# Altium PCB Blue Pill Clock.PcbDoc
Units mil, origin at the board's own origin, x right, y up, seen from the top; angles counter-clockwise.
Board outline 3858.27 x 3858.27 mil, 2 copper layers (Top Layer, Bottom Layer); 37 components, 58 nets, 279 pads, 83 vias.
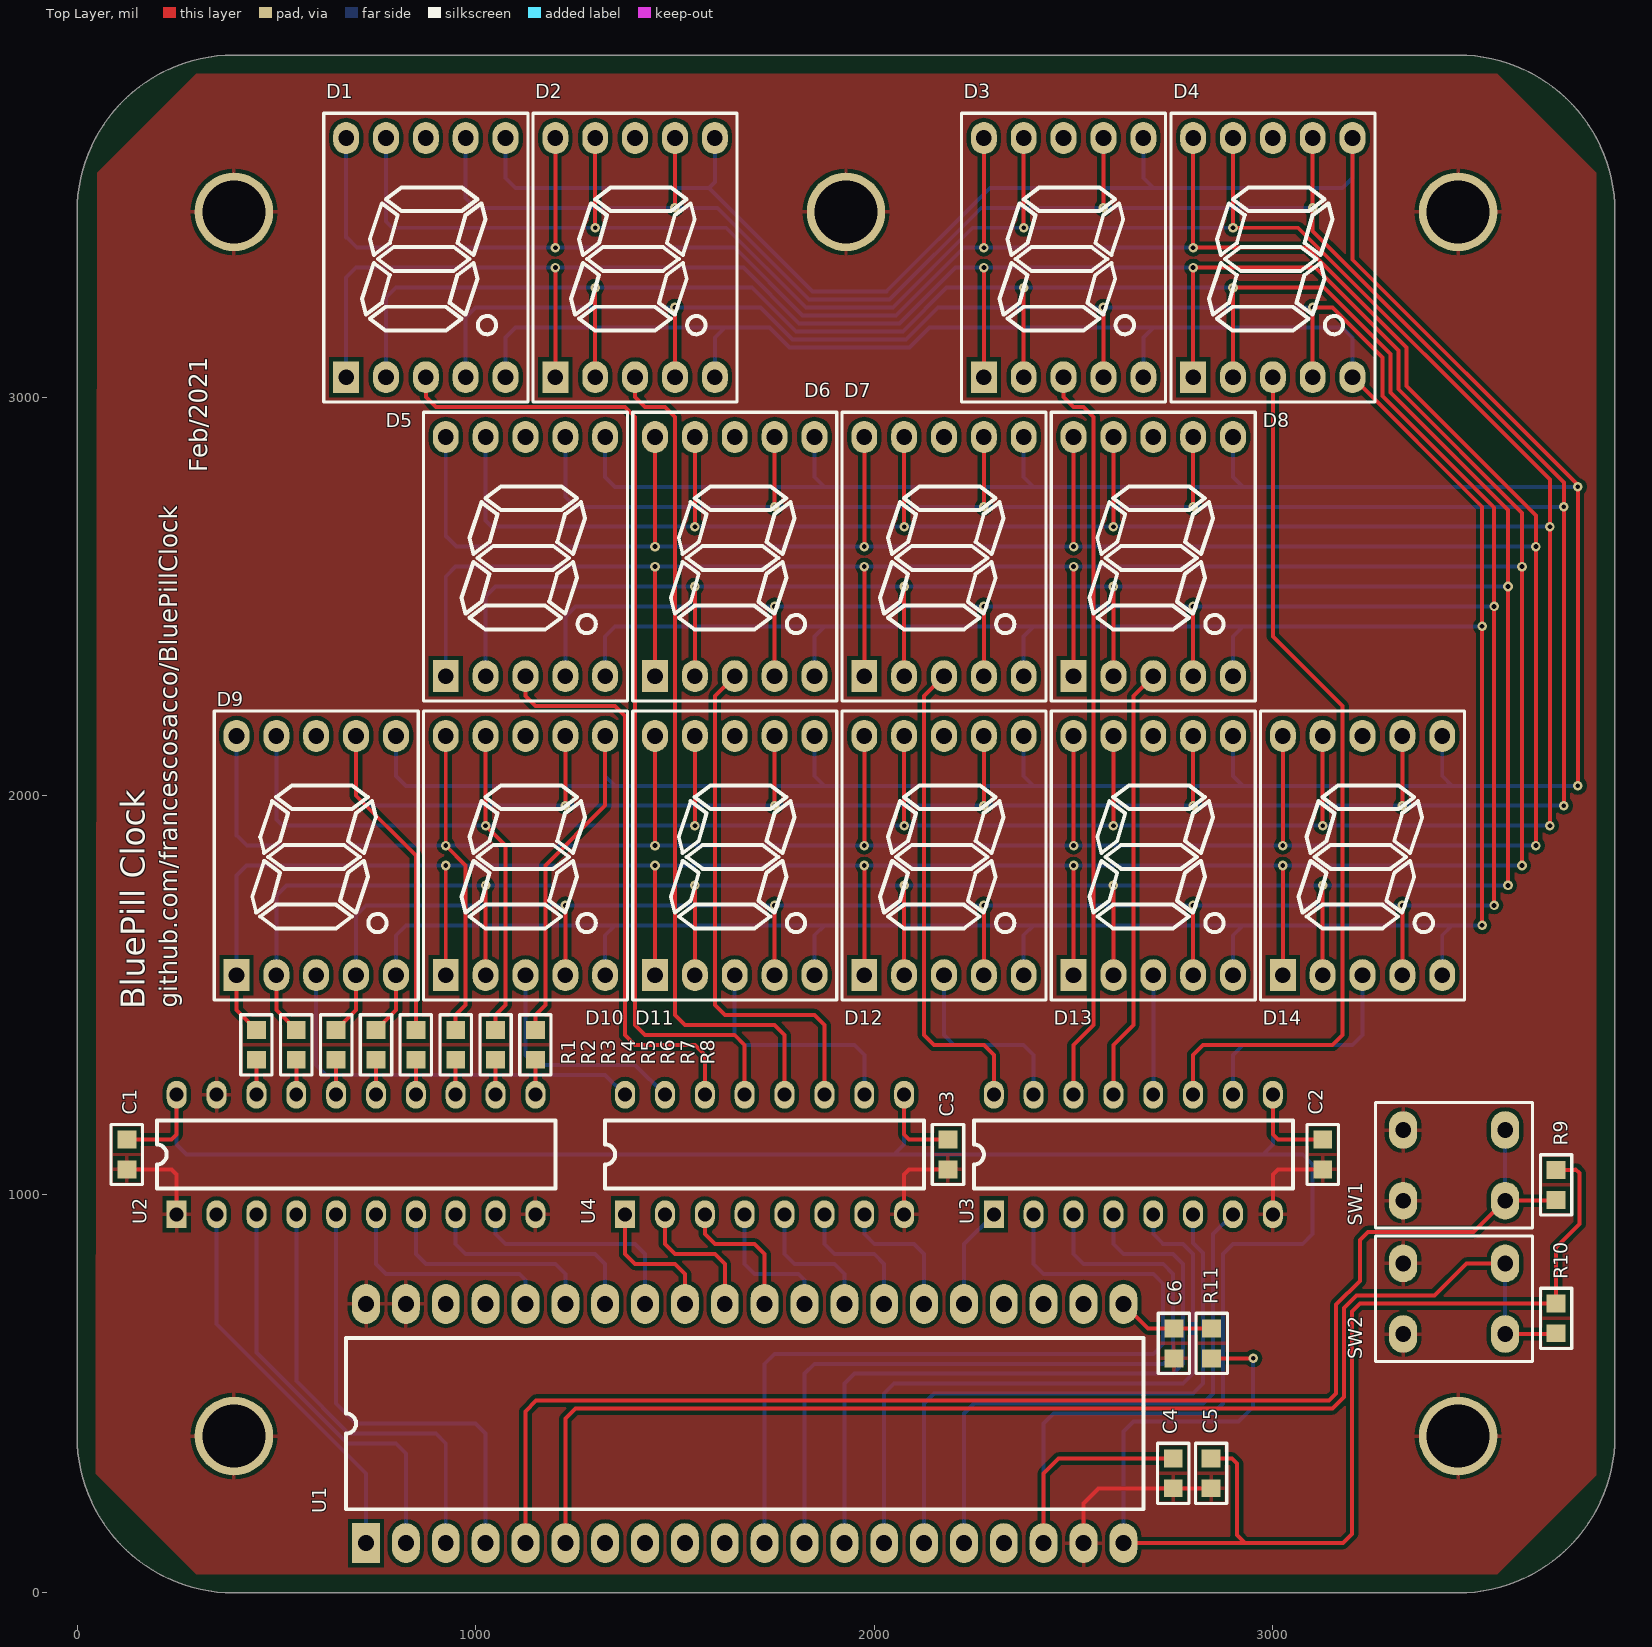
[diagram p0: Top Layer view]
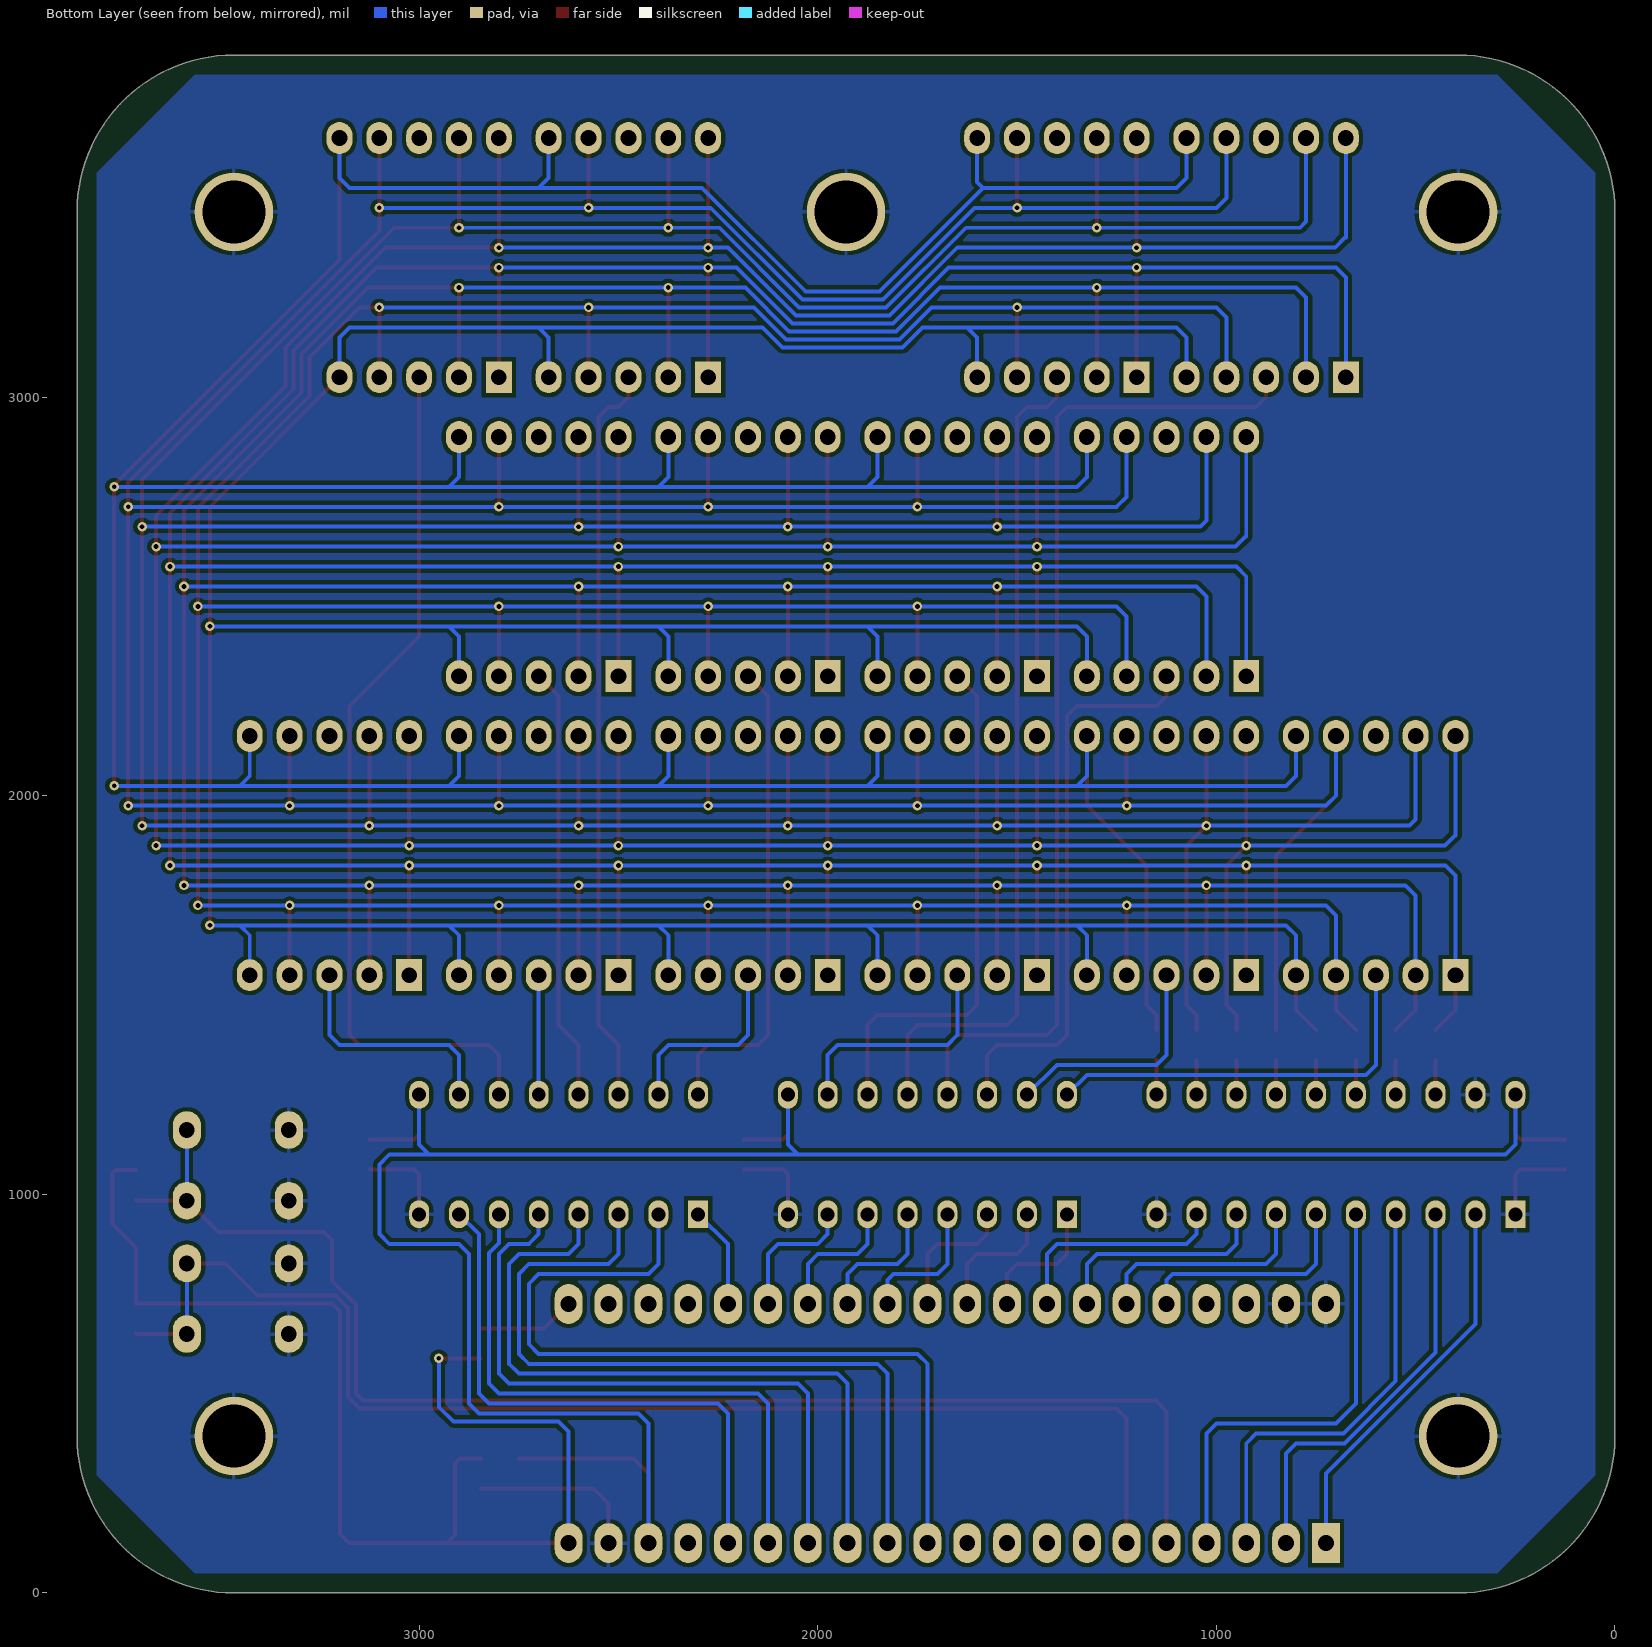
[diagram p1: Bottom Layer view, seen from below]

## Layer stack, top to bottom
Top Solder: solder mask 0.4, Solder Resist, Dk 3.5
Top Layer: signal copper 1.4
Dielectric 1: dielectric 12.6, FR-4, Dk 4.8
Bottom Layer: signal copper 1.4
Bottom Solder: solder mask 0.4, Solder Resist, Dk 3.5

## Board outline
0,393.7 0,3464.57 cw(c393.7,3464.57) 393.7,3858.27 3464.57,3858.27 cw(c3464.57,3464.57) 3858.27,3464.57 3858.27,393.7 cw(c3464.57,393.7) 3464.57,0 393.7,0 cw(c393.7,393.7)

## Design rules (kind name [scope] priority, off if disabled: settings)
Clearance [All] p1: gap=10
PolygonConnect [All] p1: connectstyle=Relief reliefconductorwidth=10 reliefentries=4 polygonreliefangle="90 Angle" airgapwidth=10
RoutingVias [All] p1: holewidth=28 width=50 viastyle="Through Hole" minholewidth=28 minwidth=50 maxholewidth=28 maxwidth=50
SolderMaskExpansion [All] p1: expansion=4
Width [All] p1: maxlimit=10 minlimit=10 preferedwidth=10
30 further rules are at their usual default settings.

## Classes and differential pairs
component class "Blue Pill - Power": C1 C2 C3 C4 C5 C6 R11
component class "Blue Pill Clock": D1 D2 D3 D4 D5 D6 D7 D8 D9 D10 D11 D12 D13 D14 R1 R2 R3 R4 R5 R6 R7 R8 R9 R10 SW1 SW2 U1 U2 U3 U4

## Components (designator, comment, footprint, x,y, rotation, side; value= is the part's Value field where it differs from the comment)
C1 "100nF" 0805 125,1100 r270 top
C2 "100nF" 0805 3125,1100 r270 top
C3 "100nF" 0805 2185,1100 r270 top
C4 "100nF" 0805 2750,300 r270 top
C5 "100nF" 0805 2845,300 r270 top
C6 "100nF" 0805 2751.97,625.98 r270 top
D1 "HS5101AG" HS5101AG 875,3350 r0 top
D2 "HS5101AG" HS5101AG 1400,3350 r0 top
D3 "HS5101AG" HS5101AG 2475,3350 r0 top
D4 "HS5101AG" HS5101AG 3000,3350 r0 top
D5 "HS5101AG" HS5101AG 1125,2600 r0 top
D6 "HS5101AG" HS5101AG 1650,2600 r0 top
D7 "HS5101AG" HS5101AG 2175,2600 r0 top
D8 "HS5101AG" HS5101AG 2700,2600 r0 top
D9 "HS5101AG" HS5101AG 600,1850 r0 top
D10 "HS5101AG" HS5101AG 1125,1850 r0 top
D11 "HS5101AG" HS5101AG 1650,1850 r0 top
D12 "HS5101AG" HS5101AG 2175,1850 r0 top
D13 "HS5101AG" HS5101AG 2700,1850 r0 top
D14 "HS5101AG" HS5101AG 3225,1850 r0 top
R1 "330R" 0805 450,1375 r90 top
R2 "330R" 0805 550,1375 r90 top
R3 "330R" 0805 650,1375 r90 top
R4 "330R" 0805 750,1375 r90 top
R5 "330R" 0805 850,1375 r90 top
R6 "330R" 0805 950,1375 r90 top
R7 "330R" 0805 1050,1375 r90 top
R8 "330R" 0805 1150,1375 r90 top
R9 "10K" 0805 3710.63,1023.62 r90 top
R10 "10K" 0805 3710.63,688.98 r90 top
R11 "0R" 0805 2846.46,625.98 r270 top
SW1 "EVQPA" EVQPAx09K 3454.72,1072.83 r90 top
SW2 "EVQPA" EVQPAx09K 3454.72,738.19 r90 top
U1 "BluePill" "Blue Pill" 1675,425 r90 top
U2 "SN74LS541" PDIP20 250,950 r90 top
U3 "ULN2003" PDIP16 2300,950 r90 top
U4 "ULN2003" PDIP16 1375,950 r90 top

## Footprints (in the part's own frame and the unit in brackets; to place one, negate y for a bottom-side part, rotate by r counter-clockwise, add the part's x,y. Pads: shape width x height; smd on the part's side, far side on the other; paste and mask are expansions set on the pad)
0805 [mm]
  rect 1.14x1.2 smd: 1(-0.95,0) 2(0.95,0)
  silkscreen extent -1.92,-1 1.92,1, body extent -1,-0.6 1,0.6, height 0.45
"Blue Pill" [mil]
  rect 100x70 hole 40: 1(-300,950)
  oval 100x70 hole 40: 2(-300,850) 3(-300,750) 4(-300,650) 5(-300,550) 6(-300,450) 7(-300,350) 8(-300,250) 9(-300,150) 10(-300,50) 11(-300,-50) 12(-300,-150) 13(-300,-250) 14(-300,-350) 15(-300,-450) 16(-300,-550) 17(-300,-650) 18(-300,-750) 19(-300,-850) 20(-300,-950) 21(300,-950) 22(300,-850) 23(300,-750) 24(300,-650) 25(300,-550) 26(300,-450) 27(300,-350) 28(300,-250) 29(300,-150) 30(300,-50) 31(300,50) 32(300,150) 33(300,250) 34(300,350) 35(300,450) 36(300,550) 37(300,650) 38(300,750) 39(300,850) 40(300,950)
  silkscreen extent -215,-1000 215,1000, body extent -455,-1045 455,1045, height 180
EVQPAx09K [mm]
  oval 2.4x1.8 hole 1: 1(-2.25,3.25) 2(2.25,3.25) 3(2.25,-3.25) 4(-2.25,-3.25)
  silkscreen extent -4,-5 4,5, body extent -3.1,-3.38 3.1,3.38, height 9.5
HS5101AG [mil]
  rect 65x80 hole 39.37: 1(-200,-300)
  oval 65x80 hole 39.37: 2(-100,-300) 3(0,-300) 4(100,-300) 5(200,-300) 6(200,300) 7(100,300) 8(0,300) 9(-100,300) 10(-200,300)
  silkscreen extent -256,-362 256,362, body extent -256,-354 256,362, height 280
PDIP16 [mil]
  rect 70x50 hole 35: 1(0,0)
  oval 70x50 hole 35: 2(0,-100) 3(0,-200) 4(0,-300) 5(0,-400) 6(0,-500) 7(0,-600) 8(0,-700) 9(300,-700) 10(300,-600) 11(300,-500) 12(300,-400) 13(300,-300) 14(300,-200) 15(300,-100) 16(300,0)
  silkscreen extent 65,-750 235,50, body extent -5,-750 305,50, height 100
PDIP20 [mil]
  rect 70x50 hole 35: 1(0,0)
  oval 70x50 hole 35: 2(0,-100) 3(0,-200) 4(0,-300) 5(0,-400) 6(0,-500) 7(0,-600) 8(0,-700) 9(0,-800) 10(0,-900) 11(300,-900) 12(300,-800) 13(300,-700) 14(300,-600) 15(300,-500) 16(300,-400) 17(300,-300) 18(300,-200) 19(300,-100) 20(300,0)
  silkscreen extent 65,-950 235,50, body extent -5,-950 305,50, height 100

## Part data
C1 C2 C3 C4 C5 C6: library part Capacitor, "Capacitor"
D1 D2 D3 D4 D5 D6 D7 D8 D9 D10 D11 D12 D13 D14: "Display 7-Segments Cathodo Common"
R1 R2 R3 R4 R5 R6 R7 R8 R9 R10 R11: library part Resistor, "Resistor"
SW1 SW2: "5N Type Light Touch Switches"
U1: library part "Blue Pill - Model 1", "STM32 Blue Pill"
U2: library part "SN74HC541 Type-2", "Octal Buffers and Line Drivers With 3-State Outputs"
U3 U4: library part "UN200x - Model 1", "Seven Darlington arrays"

## Free pads (board coordinates)
  round 196.85 hole 157.48: 1(393.7,393.7) 1(393.7,3464.57) 1(1929.13,3464.57) 1(3464.57,393.7) 1(3464.57,3464.57)

## Via types
v1: diameter 24, hole 12, Top Layer to Bottom Layer, 83 vias

## Nets (pads, with @x,y where several pads share a name; then routed paths per layer and width w, separated by ;. In a path a pad name is that pad's centre, name@x,y a point inside that pad or via, vN(x,y) a via of type N, cw(c..) or ccw(c..) an arc to the next point about the centre after c; other vN are vias at no path point)
3V3: C5.1 R9.2 R10.2 R11.2 U1.20 | length 3213.2
  Top Layer w10: U1.20 2930,125 ; C5.1 2897.6,337.4 2910,325 2910,145 2930,125 ; R11.2 v1(2950.79,588.58) ; R9.2 3757.87,1061.02 3759.84,1062.99 3769.69,1053.15 3769.69,925.2 3710.63,866.14 R10.2 3218.5,726.38 3198.82,706.69 3198.82,147.64 3176.18,125 2930,125
  Bottom Layer w10: U1.20 2625,404.53 2650.47,430 2914.25,430 2950.79,466.54 v1(2950.79,588.58)
5V: C1.1 C2.1 C3.1 C4.1 U1.18 U2.20 U3.9 U4.9 | length 6074
  Top Layer w10: C1.1 237.4,1137.4 250,1150 U2.20 ; U4.9 2075,1150 2087.6,1137.4 C3.1 ; U1.18 2425,300 2462.4,337.4 C4.1 ; U3.9 3000,1150 3012.6,1137.4 C2.1
  Bottom Layer w10: U2.20 250,1125 275,1100 2050,1100 ; U4.9 2075,1125 2050,1100 ; U1.18 2425,425 2450,450 2850,450 2875,475 2875,850 2900,875 3075,875 3100,900 3100,1075 3075,1100 2975,1100 ; U3.9 3000,1125 2975,1100 ; 2050,1100 2975,1100
BP_0: U1.29 U4.4 | length 351.8
  Bottom Layer w10: U4.4 1675,825 1700,800 1810.39,800 1825,785.39 U1.29
BP_1: U1.28 U4.5 | length 345.7
  Bottom Layer w10: U4.5 1775,850 1800,825 1900,825 1925,800 U1.28
BP_2: U1.12 U3.3 | length 1941.4
  Bottom Layer w10: U1.12 1825,550 1850,575 2725,575 2750,600 2750,800 2725,825 2525,825 2500,850 U3.3
BP_3: U1.15 U3.6 | length 1506.1
  Bottom Layer w10: U1.15 2125,475 2150,500 2800,500 2825,525 2825,853.28 2800,878.28 U3.6
BP_4: U1.30 U4.3 | length 345.7
  Top Layer w10: U4.3 1575,900 1600,875 1700,875 1725,850 U1.30
BP_5: U1.27 U4.6 | length 345.7
  Bottom Layer w10: U4.6 1875,875 1900,850 2000,850 2025,825 U1.27
BP_6: U1.25 U3.1 | length 256.1
  Bottom Layer w10: U1.25 2225,875 U3.1
BP_7: U1.13 U3.4 | length 1791.4
  Bottom Layer w10: U1.13 1925,525 1950,550 2750,550 2775,575 2775,825 2750,850 2625,850 2600,875 U3.4
BP_8: U1.32 U4.1 | length 345.7
  Top Layer w10: U4.1 1375,850 1400,825 1500,825 1525,800 U1.32
BP_9: U1.31 U4.2 | length 345.7
  Top Layer w10: U4.2 1475,875 1500,850 1600,850 1625,825 U1.31
BP_10: U1.26 U4.7 | length 345.7
  Bottom Layer w10: U4.7 1975,900 2000,875 2100,875 2125,850 U1.26
BP_11: U1.11 U3.2 | length 2091.4
  Bottom Layer w10: U1.11 1725,575 1750,600 2700,600 2725,625 2725,775 2700,800 2425,800 2400,825 U3.2
BP_12: U1.14 U3.5 | length 1641.4
  Bottom Layer w10: U1.14 2025,500 2050,525 2775,525 2800,550 2800,850 2775,875 2725,875 2700,900 U3.5
BP_13: U1.16 U3.7 | length 1441.4
  Bottom Layer w10: U1.16 2225,450 2250,475 2825,475 2850,500 2850,900 U3.7
BP_A: U1.36 U2.6 | length 576.8
  Bottom Layer w10: U2.6 750,825 775,800 1110.39,800 1125,785.39 U1.36
BP_B: U1.33 U2.9 | length 570.7
  Bottom Layer w10: U2.9 1050,900 1075,875 1400,875 1425,850 U1.33
BP_C: U1.3 U2.4 | length 1108.3
  Bottom Layer w10: U2.4 550,531.57 681.57,400 900,400 925,375 U1.3
BP_D: U1.2 U2.3 | length 1051.6
  Bottom Layer w10: U2.3 450,603.28 678.28,375 800,375 825,350 U1.2
BP_E: U1.1 U2.2 | length 980.3
  Bottom Layer w10: U2.2 350,675 725,300 U1.1
BP_F: U1.34 U2.8 | length 570.7
  Bottom Layer w10: U2.8 950,875 975,850 1300,850 1325,825 U1.34
BP_G: U1.35 U2.7 | length 570.7
  Bottom Layer w10: U2.7 850,850 875,825 1200,825 1225,800 U1.35
BP_P: U1.4 U2.5 | length 1156.1
  Bottom Layer w10: U2.5 650,475 700,425 1000,425 1025,400 U1.4
DSP_0: D1.3 U4.13 | length 2541.4
  Top Layer w10: D1.3 875,3000 900,2975 1375,2975 1400,2950 1400,1425 1425,1400 1650,1400 1675,1375 U4.13
DSP_1: D2.3 U4.12 | length 2116.4
  Top Layer w10: D2.3 1400,3000 1425,2975 1475,2975 1500,2950 1500,1450 1525,1425 1750,1425 1775,1400 U4.12
DSP_2: D3.3 U3.14 | length 1866.4
  Top Layer w10: D3.3 2475,3000 2500,2975 2525,2975 2550,2950 2550,1425 2500,1375 U3.14
DSP_3: D4.3 U3.11 | length 2218.2
  Top Layer w10: U3.11 2800,1350 2825,1375 3150,1375 3175,1400 3175,2225 3000,2400 D4.3
DSP_4: D5.3 U4.14 | length 1444.7
  Top Layer w10: D5.3 1125,2250 1150,2225 1350,2225 1375,2200 1375,1400 1400,1375 1550,1375 1575,1350 U4.14 U4.14@1571.72,1250
DSP_5: D6.3 U4.11 | length 1316.4
  Top Layer w10: D6.3 1600,2250 1600,1475 1625,1450 1850,1450 1875,1425 U4.11
DSP_6: D7.3 U3.16 | length 1216.4
  Top Layer w10: D7.3 2125,2250 2125,1400 2150,1375 2275,1375 2300,1350 U3.16
DSP_7: D8.3 U3.13 | length 1091.4
  Top Layer w10: U3.13 2600,1375 2650,1425 2650,2250 D8.3
DSP_8: D9.3 U4.16 | length 1031.1
  Bottom Layer w10: D9.3 600,1325 625,1300 1325,1300 U4.16
DSP_9: D10.3 U4.15 | length 591.4
  Bottom Layer w10: D10.3 1125,1350 1150,1325 1400,1325 U4.15
DSP_10: D11.3 U4.10 | length 595.7
  Bottom Layer w10: D11.3 1650,1400 1675,1375 1950,1375 1975,1350 U4.10
DSP_11: D12.3 U3.15 | length 495.7
  Bottom Layer w10: D12.3 2175,1400 2200,1375 2375,1375 2400,1350 U3.15
DSP_12: D13.3 U3.12 | length 300
  Bottom Layer w10: U3.12 D13.3
DSP_13: D14.3 U3.10 | length 595.7
  Bottom Layer w10: U3.10 2900,1350 2925,1375 3200,1375 3225,1400 D14.3
DSP_A: D1.7 D2.7 D3.7 D4.7 D5.7 D6.7 D7.7 D8.7 D9.7 D10.7 D11.7 D12.7 D13.7 D14.7 R5.2 | length 12817.3
  Top Layer w10: D9.7 700,2000 850,1850 R5.2 ; v1(1225,1975) D10.7 ; v1(1500,3475) D2.7 ; v1(1750,1975) D11.7 ; v1(1750,2725) D6.7 ; v1(2275,1975) D12.7 ; v1(2275,2725) D7.7 ; v1(2575,3475) D3.7 ; v1(2800,1975) D13.7 ; v1(2800,2725) D8.7 ; D4.7 v1(3100,3475) 3100,3416.42 3730,2786.42 v1(3730,2725) v1(3730,1975) ; v1(3325,1975) D14.7
  Bottom Layer w10: D9.7 700,2000 725,1975 v1(1225,1975) v1(1750,1975) v1(2275,1975) v1(2800,1975) v1(3325,1975) v1(3730,1975) ; D1.7 975,3500 1000,3475 v1(1500,3475) 1606.57,3475 1836.57,3245 2038.43,3245 2268.43,3475 v1(2575,3475) v1(3100,3475) ; D5.7 1225,2750 1250,2725 v1(1750,2725) v1(2275,2725) v1(2800,2725) v1(3730,2725)
DSP_B: D1.6 D2.6 D3.6 D4.6 D5.6 D6.6 D7.6 D8.6 D9.6 D10.6 D11.6 D12.6 D13.6 D14.6 R8.2 | length 12205.4
  Top Layer w10: R8.2 1150,1450 1175,1475 1175,1825 1325,1975 D10.6 ; D4.6 3200,3344.71 3765,2779.71 v1(3765,2775) v1(3765,2025)
  Bottom Layer w10: D9.6 800,2050 825,2025 1350,2025 ; D1.6 1075,3550 1100,3525 1584.85,3525 ; D10.6 1325,2050 1350,2025 ; D5.6 1325,2800 1350,2775 1875,2775 ; D2.6 1600,3540.15 1584.85,3525 ; D11.6 1850,2050 1875,2025 ; D6.6 1850,2800 1875,2775 ; D12.6 2375,2050 2400,2025 ; D7.6 2375,2800 2400,2775 ; D3.6 2675,3550 2700,3525 ; D13.6 2900,2050 2925,2025 ; D8.6 2900,2800 2925,2775 ; D4.6 3200,3550 3175,3525 2700,3525 ; D14.6 3425,2050 3450,2025 ; v1(3765,2025) 3450,2025 ; v1(3765,2775) 2925,2775 ; 1350,2025 1875,2025 ; 1584.85,3525 1844.85,3265 2030.15,3265 2290.15,3525 2700,3525 ; 1875,2025 2400,2025 ; 1875,2775 2400,2775 ; 2400,2025 2925,2025 ; 2400,2775 2925,2775 ; 2925,2025 3450,2025
DSP_C: D1.4 D2.4 D3.4 D4.4 D5.4 D6.4 D7.4 D8.4 D9.4 D10.4 D11.4 D12.4 D13.4 D14.4 R3.2 | length 11658.4
  Top Layer w10: R3.2 700,1462.4 D9.4 ; D10.4 v1(1225,1725) ; D2.4 v1(1500,3225) ; D11.4 v1(1750,1725) ; D6.4 v1(1750,2475) ; D12.4 v1(2275,1725) ; D7.4 v1(2275,2475) ; D3.4 v1(2575,3225) ; D13.4 v1(2800,1725) ; D8.4 v1(2800,2475) ; D4.4 v1(3100,3225) 3150,3225 3275,3100 3275,3003.28 3555,2723.28 v1(3555,2475) v1(3555,1725) ; D14.4 v1(3325,1725)
  Bottom Layer w10: D9.4 700,1700 725,1725 v1(1225,1725) v1(1750,1725) v1(2275,1725) v1(2800,1725) v1(3325,1725) v1(3555,1725) ; D1.4 975,3200 1000,3225 v1(1500,3225) 1715.15,3225 1795.15,3145 2079.85,3145 2159.85,3225 v1(2575,3225) v1(3100,3225) ; D5.4 1225,2450 1250,2475 v1(1750,2475) v1(2275,2475) v1(2800,2475) v1(3555,2475)
DSP_D: D1.2 D2.2 D3.2 D4.2 D5.2 D6.2 D7.2 D8.2 D9.2 D10.2 D11.2 D12.2 D13.2 D14.2 R2.2 | length 13055
  Top Layer w10: D9.2 500,1462.4 R2.2 ; D10.2 v1(1025,1775) ; D2.2 v1(1300,3275) ; D11.2 v1(1550,1775) ; D6.2 v1(1550,2525) ; D12.2 v1(2075,1775) ; D7.2 v1(2075,2525) ; D3.2 v1(2375,3275) ; D13.2 v1(2600,1775) ; D8.2 v1(2600,2525) ; D4.2 v1(2900,3275) 3128.28,3275 3295,3108.28 3295,3011.57 3590,2716.57 v1(3590,2525) v1(3590,1775) ; D14.2 v1(3125,1775)
  Bottom Layer w10: D9.2 500,1750 525,1775 v1(1025,1775) v1(1550,1775) v1(2075,1775) v1(2600,1775) v1(3125,1775) v1(3590,1775) ; D1.2 775,3250 800,3275 v1(1300,3275) 1693.43,3275 1803.43,3165 2071.57,3165 2181.57,3275 v1(2375,3275) v1(2900,3275) ; D5.2 1025,2500 1050,2525 v1(1550,2525) v1(2075,2525) v1(2600,2525) v1(3590,2525)
DSP_E: D1.1 D2.1 D3.1 D4.1 D5.1 D6.1 D7.1 D8.1 D9.1 D10.1 D11.1 D12.1 D13.1 D14.1 R1.2 | length 14151.7
  Top Layer w10: D9.1 400,1462.4 R1.2 ; D10.1 v1(925,1825) ; D2.1 v1(1200,3325) ; D11.1 v1(1450,1825) ; D6.1 v1(1450,2575) ; D12.1 v1(1975,1825) ; D7.1 v1(1975,2575) ; D3.1 v1(2275,3325) ; D13.1 v1(2500,1825) ; D8.1 v1(2500,2575) ; D4.1 v1(2800,3325) 3106.57,3325 3315,3116.57 3315,3019.85 3625,2709.85 v1(3625,2575) v1(3625,1825) ; D14.1 v1(3025,1825)
  Bottom Layer w10: D9.1 400,1800 425,1825 v1(925,1825) v1(1450,1825) v1(1975,1825) v1(2500,1825) v1(3025,1825) v1(3625,1825) ; D1.1 675,3300 700,3325 v1(1200,3325) 1671.72,3325 1811.72,3185 2063.28,3185 2203.28,3325 v1(2275,3325) v1(2800,3325) ; D5.1 925,2550 950,2575 v1(1450,2575) v1(1975,2575) v1(2500,2575) v1(3625,2575)
DSP_F: D1.9 D2.9 D3.9 D4.9 D5.9 D6.9 D7.9 D8.9 D9.9 D10.9 D11.9 D12.9 D13.9 D14.9 R7.2 | length 13747.3
  Top Layer w10: D10.9 v1(1025,1925) 1075,1875 1075,1475 1050,1450 R7.2 ; v1(1300,3425) D2.9 ; v1(1550,1925) D11.9 ; v1(1550,2675) D6.9 ; v1(2075,1925) D12.9 ; v1(2075,2675) D7.9 ; v1(2375,3425) D3.9 ; v1(2600,1925) D13.9 ; v1(2600,2675) D8.9 ; D4.9 v1(2900,3425) 3063.14,3425 3695,2793.14 v1(3695,2675) v1(3695,1925) ; v1(3125,1925) D14.9
  Bottom Layer w10: D9.9 500,1940.29 515.29,1925 v1(1025,1925) v1(1550,1925) v1(2075,1925) v1(2600,1925) v1(3125,1925) v1(3695,1925) ; D1.9 775,3440.29 790.29,3425 v1(1300,3425) 1628.28,3425 1828.28,3225 2046.72,3225 2246.72,3425 v1(2375,3425) v1(2900,3425) ; D5.9 1025,2690.29 1040.29,2675 v1(1550,2675) v1(2075,2675) v1(2600,2675) v1(3695,2675)
DSP_G: D1.10 D2.10 D3.10 D4.10 D5.10 D6.10 D7.10 D8.10 D9.10 D10.10 D11.10 D12.10 D13.10 D14.10 R6.2 | length 14583.6
  Top Layer w10: D10.10 v1(925,1875) 975,1825 975,1475 950,1450 R6.2 ; v1(1200,3375) D2.10 ; v1(1450,1875) D11.10 ; v1(1450,2625) D6.10 ; v1(1975,1875) D12.10 ; v1(1975,2625) D7.10 ; v1(2275,3375) D3.10 ; v1(2500,1875) D13.10 ; v1(2500,2625) D8.10 ; D4.10 v1(2800,3375) 3084.85,3375 3335,3124.85 3335,3028.14 3660,2703.14 v1(3660,2625) v1(3660,1875) ; v1(3025,1875) D14.10
  Bottom Layer w10: D9.10 400,1900 401.72,1900 426.72,1875 v1(925,1875) v1(1450,1875) v1(1975,1875) v1(2500,1875) v1(3025,1875) v1(3660,1875) ; D1.10 675,3400 676.72,3400 701.72,3375 v1(1200,3375) 1650,3375 1820,3205 2055,3205 2225,3375 v1(2275,3375) v1(2800,3375) ; D5.10 925,2650 926.72,2650 951.72,2625 v1(1450,2625) v1(1975,2625) v1(2500,2625) v1(3660,2625)
DSP_P: D1.5 D2.5 D3.5 D4.5 D5.5 D6.5 D7.5 D8.5 D9.5 D10.5 D11.5 D12.5 D13.5 D14.5 R4.2 | length 10554.3
  Top Layer w10: R4.2 800,1462.4 D9.5 ; D4.5 3525,2725 v1(3525,2425) v1(3525,1675)
  Bottom Layer w10: D9.5 800,1650 825,1675 1350,1675 ; D1.5 1075,3150 1100,3175 1625,3175 ; D10.5 1325,1650 1350,1675 ; D5.5 1325,2400 1350,2425 1875,2425 ; D2.5 1600,3150 1625,3175 ; D11.5 1850,1650 1875,1675 ; D6.5 1850,2400 1875,2425 ; D12.5 2375,1650 2400,1675 ; D7.5 2375,2400 2400,2425 ; D3.5 2675,3150 2700,3175 ; D13.5 2900,1650 2925,1675 ; D8.5 2900,2400 2925,2425 ; D4.5 3200,3150 3175,3175 2700,3175 ; D14.5 3425,1650 3450,1675 ; v1(3525,1675) 3450,1675 ; v1(3525,2425) 2925,2425 ; 1350,1675 1875,1675 ; 1625,3175 1736.86,3175 1786.86,3125 2088.14,3125 2138.14,3175 2700,3175 ; 1875,1675 2400,1675 ; 1875,2425 2400,2425 ; 2400,1675 2925,1675 ; 2400,2425 2925,2425 ; 2925,1675 3450,1675
GND: C1.2 C2.2 C3.2 C4.2 C5.2 C6.2 pad.1 SW1.1 SW1.2 SW2.1 SW2.2 U1.19 U1.39 U1.40 U2.1 U2.10 U2.19 U3.8 U4.8 | length 1111.2
  Top Layer w10: C1.2 237.4,1062.6 250,1050 U2.1 ; U4.8 2075,1050 2087.6,1062.6 C3.2 ; U1.19 2525,225 2562.6,262.6 C4.2 C5.2 ; U3.8 3000,1050 3012.6,1062.6 C2.2
NetC6_1: C6.1 R11.1 U1.21 | length 247
  Top Layer w10: U1.21 2686.61,663.39 C6.1 R11.1
NetR1_1: R1.1 U2.18 | length 87.6
  Top Layer w10: U2.18 R1.1
NetR2_1: R2.1 U2.17 | length 87.6
  Top Layer w10: U2.17 R2.1
NetR3_1: R3.1 U2.16 | length 87.6
  Top Layer w10: U2.16 R3.1
NetR4_1: R4.1 U2.15 | length 87.6
  Top Layer w10: U2.15 R4.1
NetR5_1: R5.1 U2.14 | length 87.6
  Top Layer w10: U2.14 R5.1
NetR6_1: R6.1 U2.13 | length 87.6
  Top Layer w10: U2.13 R6.1
NetR7_1: R7.1 U2.12 | length 87.6
  Top Layer w10: U2.12 R7.1
NetR8_1: R8.1 U2.11 | length 87.6
  Top Layer w10: U2.11 R8.1
SW1: R9.1 SW1.3 SW1.4 U1.5 | length 3504.2
  Top Layer w10: U1.5 1125,455.71 1151.89,482.6 3141.32,482.6 3158.82,500.1 3158.82,723.26 3218.5,782.95 3218.5,885.83 3238.19,905.51 3503.94,905.51 SW1.4 3708.66,984.25 R9.1
  Bottom Layer w10: SW1.4 SW1.3
SW2: R10.1 SW2.3 SW2.4 U1.6 | length 3268.1
  Top Layer w10: U1.6 1225,437.6 1250,462.6 3149.61,462.6 3178.82,491.81 3178.82,714.98 3210.22,746.38 3405.51,746.38 3485.91,826.77 SW2.3 ; SW2.4 3708.66,649.61 R10.1
  Bottom Layer w10: SW2.4 SW2.3
pads on no net: D1.8 D2.8 D3.8 D4.8 D5.8 D6.8 D7.8 D8.8 D9.8 D10.8 D11.8 D12.8 D13.8 D14.8 U1.7 U1.8 U1.9 U1.10 U1.17 U1.22 U1.23 U1.24 U1.37 U1.38

## Polygon pours and split planes (outlines as drawn)
GND on Bottom Layer "GND" (solid, remove dead copper, pour order 4): 49.21,295.28 295.28,49.21 3562.99,49.21 3809.06,295.28 3809.06,3562.99 3562.99,3809.05 295.28,3809.05 49.21,3562.99
GND on Top Layer "GND" (solid, remove dead copper, pour order 3): 51.18,3562.99 299.21,3811.02 330.71,3811.02 3562.99,3811.02 3586.61,3787.4 3811.02,3562.99 3811.02,3354.33 3811.02,295.28 3767.72,251.97 3562.99,47.24 3480.32,47.24 299.21,47.24 244.09,102.36 47.24,299.21 47.24,307.09

## Silkscreen, mask and mechanical layers (free items; w line width, h text height)
Top Overlay:
  text "Feb/2021" at 326.77,2811.02 h45 r90
  text "github.com/francescosacco/BluePillClock" at 251.97,1468.5 h45 r90
  text "BluePill Clock" at 169.29,1464.57 h60 r90
Mechanical 1:
  the board outline again, w10